# Altium PCB IPG_Rigid.PcbDoc (part 8 of 13)
Units mm, origin at the board's own origin, x right, y up, seen from the top; angles counter-clockwise.
Board outline 69.6 x 90.73 mm, 10 copper layers (TOP, DHOR, DVERT, GND 1, POWER, GND 2, GND 3, AVERT, AHOR, BOT), stack 1.198 mm thick; 745 components, 398 nets, 1997 pads, 2678 vias.
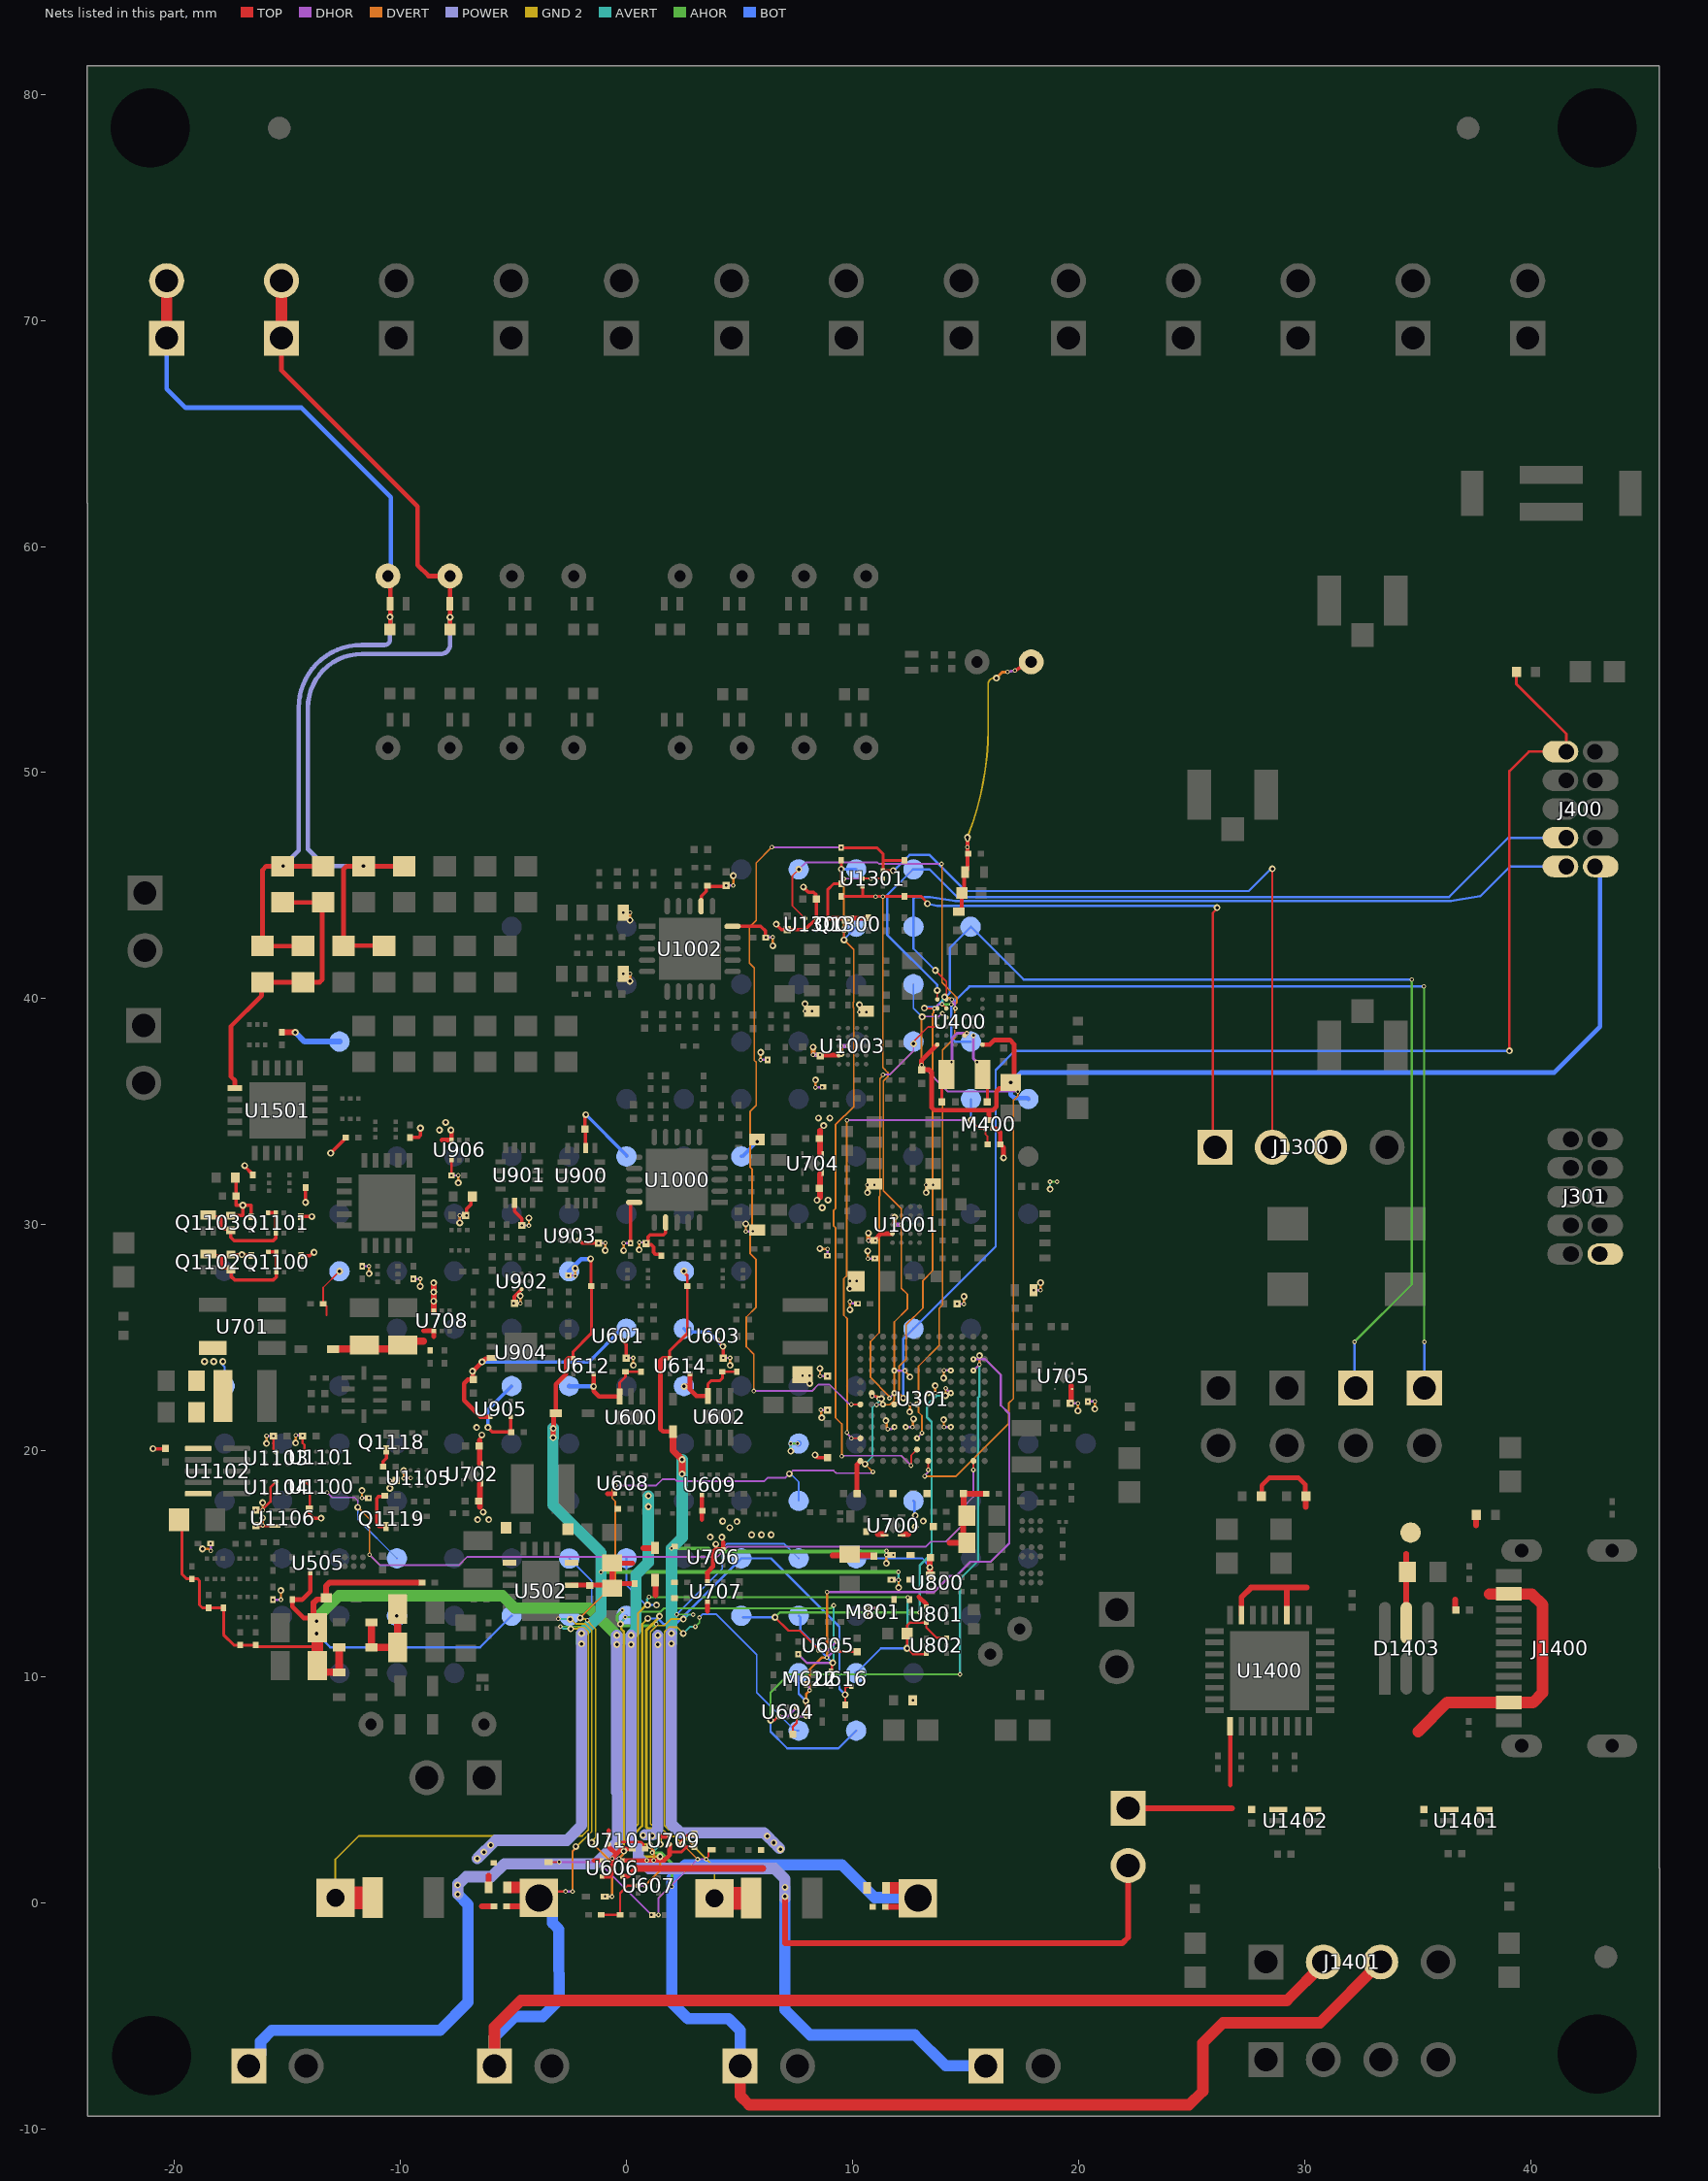
[diagram p12: the nets of this part, all layers, seen from the top]

## Via types
v1: diameter 0.203, hole 0.102, TOP to DHOR, tented top, 561 vias
v2: diameter 0.203, hole 0.102, DHOR to DVERT, tented top, 481 vias
v3: diameter 0.305/0.305/0.305/0.305/0.305/0.305 (per signal layer), hole 0.152, DVERT to AVERT, 397 vias
v4: diameter 0.305/0.305/0/0.305/0.305/0.305 (per signal layer), hole 0.152, DVERT to AVERT, tented top, 283 vias
v5: diameter 0.305/0.305/0.305/0.305/0/0.305/0.305/0.305/0.305/0.305 (per signal layer), hole 0.152, TOP to BOT, 259 vias
v6: diameter 0.305, hole 0.152, TOP to BOT, tented both sides, 169 vias
v7: diameter 0.305/0.305/0.305/0.305/0/0.305/0.305/0.305/0.305/0.305 (per signal layer), hole 0.152, TOP to BOT, tented both sides, 140 vias
v8: diameter 0.203, hole 0.102, AVERT to AHOR, tented top, 101 vias
v9: diameter 0.305/0.305/0.305/0.305/0.305/0.305 (per signal layer), hole 0.152, DVERT to AVERT, tented top, 79 vias
v10: diameter 0.305/0/0/0.305/0/0.305/0.305/0/0/0.305 (per signal layer), hole 0.152, TOP to BOT, tented both sides, 74 vias
v11: diameter 0.305/0.305/0.305/0.305/0.305/0.305/0.305/0.305/0.305/0.305 (per signal layer), hole 0.152, TOP to BOT, tented both sides, 66 vias
v12: diameter 0.203, hole 0.102, AHOR to BOT, tented both sides, 31 vias
v13: diameter 0.203, hole 0.102, DHOR to DVERT, tented both sides, 9 vias
v14: diameter 0.203/0.203 (per signal layer), hole 0.102, DHOR to DVERT, tented top, 7 vias
v15: diameter 0.203/0.203 (per signal layer), hole 0.102, TOP to DHOR, tented top, 7 vias
v16: diameter 0.203, hole 0.102, TOP to DHOR, tented both sides, 5 vias
v17: diameter 0.305, hole 0.152, DVERT to AVERT, tented both sides, 2 vias
v18: diameter 0.305/0.305/0/0.305/0.305/0.305 (per signal layer), hole 0.152, DVERT to AVERT, tented both sides, 2 vias
v19: diameter 0.305, hole 0.152, DVERT to AVERT, tented top, 2 vias
v20: diameter 0.305/0/0/0.305/0.305/0.305/0.305/0/0/0.305 (per signal layer), hole 0.152, TOP to BOT, tented both sides, 1 vias
v21: diameter 0.305/0.305/0/0.305/0.305/0.305 (per signal layer), hole 0.152, DVERT to AVERT, 1 vias
v22: diameter 0.203, hole 0.102, TOP to BOT, tented top, 1 vias

## Nets (pads, with @x,y where several pads share a name; then routed paths per layer and width w, separated by ;. In a path a pad name is that pad's centre, name@x,y a point inside that pad or via, vN(x,y) a via of type N, cw(c..) or ccw(c..) an arc to the next point about the centre after c; other vN are vias at no path point) (continued)
+DVDD: C303.1 C307.2 C308.2 C309.2 C310.2 C312.2 C313.1 C314.1 C315.2 C316.2 C319.1 C320.2 C700.2 C712.2 C1300.2 C1302.2 J301.1 J1300.3 L301.1 M400.2 M801.2 R300.1 R302.2 R303.2 R400.1 R513.1 R514.1 R714.1 TP700.1 U301.A12 U301.D4 U301.D8 U301.D9 U301.F7 U301.G6 U301.J4 U301.J9 U700.1 U705.4 U1300.1 U1300.5 | length 28
  TOP w0.1: C319.1@7.532,23.425 C319.1@8.07,23.425 ; C320.2@8.9,23.33 C320.2@8.93,23.3 ; v1(11.85,23.543) U301.J9@11.85,23.55
  TOP w0.152: v10(6.624,43.298) 6.864,43.058 C1300.2@7.112,43.058 7.892,43.058 U1300.1@7.9,43.05 U1300.5@8.4,43.55 C1302.2@8.4,44.397 ; v10(7.827,44.934) 8.049,44.711 8.281,44.711 8.37,44.622 8.37,44.432 C1302.2@8.403,44.399 ; v10(8.341,19.814) 8.455,19.7 C316.2@8.9,19.7
  TOP w0.203: C307.2@10.2,18.1 10.2,19.4 U301.A12@10.35,19.55 ; M400.2@16.184,34.251 16.371,34.251 16.536,34.086 R400.1@16.536,33.553 16.681,33.408 v10(16.681,32.956)
  TOP w0.254: C319.1@8.07,23.425 8.07,23.383 C319.1@8.123,23.33 ; 12.223,16.32 12.477,16.32 ; 14.295,15.922 C313.1@15.049,15.922 14.898,16.073 14.898,16.973 C314.1@15.049,17.124 14.918,17.256 14.918,17.855 ; 14.919,17.856 14.919,18.101 R302.2@15.919,18.101 ; C712.2@19.673,22.096 19.673,22.88 ; R300.1@20.415,22.18 20.417,22.178 R300.1@20.417,22.175
  DVERT w0.102: v9@-18.737,15.652 -18.732,15.658 -18.503,15.658 -18.423,15.578 v2(-18.396,15.578) ; v2(-15.291,13.411) v3(-15.291,13.818) ; v2(8.099,23.319) 8.105,23.314 8.105,23.013 v9@8.11,23.007 ; v9(8.557,23.643) 8.563,23.637 8.563,23.304 v2(8.568,23.298) ; v2(8.596,21.809) 8.615,21.79 8.615,21.482 v9(8.639,21.458) ; v9@9.875,27.196 9.877,27.198 9.877,27.508 v2(9.878,27.51) 9.88,27.508 v2@9.938,27.508 ; v2(9.881,26.594) 9.884,26.59 9.884,26.241 v9(9.888,26.238) ; v2(10.665,13.051) 10.665,13.024 10.73,12.958 10.73,12.764 v9@10.774,12.72 ; v9(11.479,21.337) 11.508,21.308 11.508,21.032 11.557,20.982 v2(11.557,20.955) ; v2(12.319,23.546) 12.319,23.518 12.538,23.299 v9(12.538,23.267) ; v9@12.535,21.742 12.541,21.748 12.541,22.048 v2(12.546,22.054) ; v2(12.655,21.046) 12.674,21.067 12.674,21.375 v9(12.706,21.406) ; v2@13.654,22.546 13.659,22.552 13.659,22.852 v9@13.665,22.858 ; v9@14.035,21.358 14.041,21.352 14.041,21.052 v2(14.046,21.046) ; v9@14.035,23.242 14.041,23.248 14.041,23.548 v2(14.046,23.554) ; v2@14.927,26.49 14.933,26.496 14.933,26.797 v9@14.938,26.802 ; v2(18.323,27.104) 18.325,27.107 18.325,27.408 v9@18.328,27.41 ; v9(19.976,21.768) v2(19.976,22.098) ; v9(20.72,21.85) v2(20.72,22.18)
  AVERT w0.102: v9@18.739,31.598 v8@18.739,31.899
  DHOR w0.102: v1@-18.429,15.967 -18.396,15.934 v2(-18.396,15.578) ; v1(-15.646,13.411) v2(-15.291,13.411) ; v1(7.788,23.324) 7.79,23.322 8.097,23.322 v2(8.099,23.319) ; v2@8.569,23.299 v1(8.9,23.3) ; v2(8.596,21.809) 8.601,21.804 8.896,21.804 v1(8.902,21.798) ; v2(9.881,26.594) 9.908,26.594 9.982,26.52 v1(10.243,26.52) ; v2@9.882,27.508 10.181,27.508 v1(10.183,27.506) ; v2(10.665,13.051) 10.676,13.039 11.077,13.039 v1(11.089,13.028) ; v2(11.557,20.955) 11.559,20.957 11.731,20.957 11.824,21.05 v1@11.85,21.05 ; v1(11.85,23.543) 11.851,23.545 v2(12.319,23.546) v2(12.319,23.546) ; v1(12.35,21.05) 12.352,21.048 12.652,21.048 v2(12.655,21.046) ; v2(12.546,22.054) 12.548,22.052 12.848,22.052 v1@12.85,22.05 ; v1(13.35,22.55) 13.352,22.548 13.652,22.548 v2@13.654,22.546 ; v2(14.046,21.046) 14.048,21.048 14.348,21.048 v1(14.352,21.05) ; v2(14.046,23.554) 14.048,23.552 14.348,23.552 v1(14.352,23.55) ; v1(14.624,26.494) 14.626,26.492 14.925,26.492 v2@14.927,26.49 ; v1(18.013,27.102) 18.014,27.103 18.322,27.103 v2(18.323,27.104) ; v1(19.671,22.094) 19.673,22.096 19.973,22.096 v2@19.975,22.098 ; v1(20.415,22.176) 20.417,22.178 20.717,22.178 v2@20.719,22.18
  AHOR w0.102: v8(18.742,31.902) v12(19.051,31.903)
  BOT w0.102: TP700.1@12.7,17.78 12.738,17.742 12.738,17.17 v11(12.776,17.132) ; J1300.3@31.115,33.401 J1300.3@31.115,33.43 J1300.3@31.115,33.553
  BOT w0.203: J1300.3@31.115,33.553 J1300.3@31.239,33.553
  other v1: -18.403,15.895 11.852,21.05 12.852,22.05
  other v2: 13.655,22.546 14.929,26.49
  other v9: 10.769,12.695 -18.762,15.657 14.03,21.378 12.53,21.717 13.66,22.878 8.105,22.982 14.03,23.217 14.933,26.822 9.88,27.176 18.323,27.435 18.746,31.571
  other v11: 12.776,16.637 13.131,16.891
  other v22: 12.675,8.966
+HVIN: C701.1 C702.1 L700.1 TP703.1 U701.5 U706.3 U707.3 | length 3.5
  TOP w0.203: U707.3@3.583,14.217 3.583,14.629 3.833,14.879 3.833,15.522 3.952,15.641 U706.3@4.283,15.641 4.283,15.952
  BOT w0.1: v11@-17.958,23.947 -17.958,23.978 v11@-17.919,24.017 ; v11@-17.907,24.028 v11@-17.919,24.017 ; TP703.1@-17.78,22.86 -17.78,23.713 -17.919,23.852 v11@-17.919,24.017
  other v11: 3.956,15.865 3.708,16.182 4.225,16.176 -18.669,23.947 -18.263,23.947 -17.858,23.947
+HVOUT: C703.1 C704.1 D700.1 R703.1 R706.2 TP704.1 U708.4 | length 7.2
  TOP w0.076: R706.2@-13.42,26.5 -13.42,27.22 v7(-12.7,27.94) ; R706.2@-13.375,26.5 -13.277,26.402 -13.277,25.984
  TOP w0.203: -8.987,25.306 U708.4@-8.529,25.306 -8.529,25.036
  TOP w0.33: D700.1@-12.985,24.5 -12.975,24.51 -10.065,24.51 C704.1@-9.9,24.675 -9.726,24.849 -8.987,24.849
+V_UNREG: C705.1 C706.2 C707.2 C710.2 D703.1 R700.2 R701.1 R704.1 R709.1 TP702.1 TP706.1 U700.4 U702.4 U704.4 U707.4 U709.A2 U710.A2 | length 18.6
  TOP w0.076: D703.1@1.257,14.271 1.257,14.069 D703.1@1.291,14.035
  TOP w0.203: U710.A2@-0.782,2.941 -0.782,3.199 ; 1.575,2.941 U709.A2@1.908,2.941 ; 3.583,12.905 U707.4@3.583,13.317
  TOP w0.254: -6.493,17.515 -6.493,18.545 ; 1.291,13.61 D703.1@1.291,14.035 ; 8.569,31.218 8.569,32.248 ; 9.111,15.365 C706.2@10.936,15.365 ; 11.123,16.32 11.377,16.32
  POWER w0.5: v11@0.817,3.019 v11@1.174,3.019 ; v11@1.194,3.039 1.2,3.039 1.382,3.221 v11@1.382,11.419 ; v11@1.381,11.83 1.382,11.829 v11@1.382,11.43
  AVERT w0.102: v9@7.261,20.011 v8@7.261,20.312
  AHOR w0.102: v8(7.264,20.315) v12@7.572,20.316
  BOT w0.076: TP702.1@0,15.24 0,14.046 0.871,13.175 v7(1.328,13.175)
  BOT w0.254: TP706.1@7.603,20.303 TP706.1@7.62,20.32
  other v9: 7.268,19.985
  other v11: 1.138,2.963 0.733,2.982 1.384,11.421 1.384,11.83 5.537,16.281 5.969,16.281 6.4,16.281 -6.591,16.952 -6.092,16.952 -6.341,17.287 8.661,30.75 8.433,31.085 8.918,31.092
  other v12: 7.573,20.316
+VBAT1CHG: R601.1 R607.2 TP601.1 U600.3 U612.4 | length 5
  TOP w0.127: U600.3@-0.3,22.4 -0.3,23.017 -0.05,23.267 R601.1@-0.05,23.495 R607.2@0.635,23.494
  TOP w0.203: U612.4@-1.455,23.399 v7(-1.455,22.843) -1.455,22.639 -1.216,22.4 U600.3@-0.3,22.4
  BOT w0.203: TP601.1@-2.54,22.86 -2.532,22.852 -1.463,22.852 v7(-1.455,22.843)
+VBAT1F: D600.1 D800.2 L600.2 R602.1 R608.2 R609.1 TP604.1 U606.4 U612.1 | length 50.3
  TOP w0.127: U612.1@-2.355,24.099 -2.373,24.117 -2.373,24.37 -1.555,25.189 R602.1@-1.555,27.285 -1.57,27.3 -1.57,28.474 v7(-1.585,28.489)
  TOP w0.203: v7@-3.264,21.014 -3.248,21.014 -3.224,21.038 -3.224,21.593 -3.151,21.666 D600.1@-3.128,21.666 ; v7@-3.246,20.606 -3.245,20.607 v7(-3.243,20.991) v7(-3.243,20.991) ; D600.1@-3.128,21.608 D600.1@-3.128,21.666 ; U612.1@-2.355,24.099 -2.561,24.099 -2.68,23.98 -2.68,23.388 -3.128,22.94 D600.1@-3.128,21.666 ; -1.44,1.876 U606.4@-1.11,1.876
  TOP w0.254: -6.404,-0.152 R608.2@-5.897,-0.152 ; L600.2@-6.105,0.686 -6.105,1.193
  DVERT w0.102: v2(12.037,14.283) 12.041,14.278 12.041,13.977 v4@12.047,13.971
  POWER w0.5: v11(-6.604,1.956) -5.791,2.769 -2.637,2.769 -1.99,3.415 v9(-1.99,11.457) v9@-1.99,11.899 ; v9@-1.991,11.899 v9(-1.991,11.918)
  AVERT w0.102: v8(12.026,14.64) 12.034,14.633 12.034,13.954 v4(12.042,13.946)
  AVERT w0.203: v7@-3.251,20.523 -3.246,20.529 v7(-3.246,20.579)
  AVERT w0.5: v7@-3.251,20.523 -3.251,17.604 -1.136,15.488 v8(-1.136,14.636) -1.136,12.773 v9(-1.991,11.918) v9@-1.991,11.498 ; v7(-3.246,20.579) v7@-3.246,21.002
  DHOR w0.102: v1(11.732,14.279) 11.734,14.281 12.034,14.281 v2(12.037,14.283)
  AHOR w0.102: v8(-1.136,14.636) v8@-1.133,14.638 ; v8@12.024,14.638 v8(12.026,14.64)
  AHOR w0.152: v8@-1.133,14.638 v8@12.024,14.638
  BOT w0.203: TP604.1@-2.54,27.94 -2.001,28.479 -1.594,28.479 v7(-1.585,28.489) v7@-1.575,28.499
  other v11: -6.311,2.248 -6.009,2.551
+VBAT1R: J600.1 J602.1 J1401.2 L600.1 R608.1 TP603.1 | length 67.1
  TOP w0.102: J600.1@-3.875,0.221 -3.512,0.584 -3.437,0.509 v1(-2.693,0.509)
  TOP w0.254: R608.1@-5.271,-0.152 J600.1@-4.388,-0.152
  TOP w0.5: J602.1@-5.842,-7.214 -5.842,-5.486 -4.674,-4.318 29.215,-4.318 30.836,-2.697 J1401.2@30.836,-2.616 ; L600.1@-5.168,0.683 J600.1@-4.215,0.683
  DVERT w0.102: v2(-2.388,0.505) -2.388,2.285 -2.237,2.436 v9(-2.237,2.491)
  GND 2 w0.076: v4(-2.489,12.548) -2.448,12.548 -2.238,12.337 -1.817,12.337 -1.534,12.055 -1.534,10.858 -1.534,3.759 -1.534,3.154 -2.197,2.491 v9(-2.237,2.491)
  AVERT w0.076: v8(-3.013,12.566) -3.003,12.557 -2.499,12.557 v4(-2.489,12.548)
  DHOR w0.102: v1(-2.693,0.509) v1(-2.693,0.509) -2.392,0.507 v2@-2.39,0.505
  AHOR w0.076: v8(-3.013,12.566) -3.006,12.56 -2.533,12.56 v12(-2.526,12.554)
  BOT w0.076: v12(-2.526,12.554) -2.526,12.663 TP603.1@-2.506,12.683
  BOT w0.5: J602.1@-5.842,-7.214 -5.842,-5.944 -4.928,-5.029 -3.713,-5.029 -2.976,-4.292 -2.993,-1.83 -2.993,-1.829 -2.998,-1.168 -3.2,-0.965 -3.275,-0.891 -3.275,-0.379 J600.1@-3.875,0.221
+VBAT1SW: R625.1 R712.2 TP605.1 U606.3 U616.4 U709.A1 | length 30.9
  TOP w0.102: R625.1@9.677,8.755 v7(9.677,9.206) 9.677,9.503 9.737,9.562 U616.4@9.95,9.562
  TOP w0.127: 1.908,2.258 2.441,2.258 2.671,2.489 R712.2@2.997,2.489
  TOP w0.203: U606.3@-0.185,1.874 1.671,1.874 1.908,2.111 1.908,2.258 U709.A1@1.908,2.591
  DVERT w0.102: v9(1.029,2.539) 1.029,2.484 1.203,2.311 v2(1.203,1.872)
  GND 2 w0.102: v7(0.942,12.581) 0.693,12.331 0.693,10.858 0.693,3.759 0.693,3.406 0.403,3.116 0.403,2.763 0.589,2.577 0.992,2.577 v9(1.029,2.539)
  DHOR w0.102: v1(0.898,1.876) 0.9,1.874 v2@1.199,1.874
  BOT w0.102: v7(0.942,12.581) 1.394,12.581 1.649,12.326 2.166,12.326 TP605.1@5.08,15.24 6.401,15.24 9.423,12.217 9.423,9.46 v7(9.677,9.206)
+VBAT2CHG: R612.1 R621.2 TP619.1 U602.3 U614.4 | length 4.1
  TOP w0.076: R621.2@4.88,23.495 R621.2@4.883,23.498
  TOP w0.127: U602.3@3.6,22.425 3.6,22.955 3.734,23.089 4.123,23.089 4.242,23.208 R612.1@4.242,23.495 R621.2@4.88,23.495
  TOP w0.203: v7(2.544,22.848) 2.562,22.866 2.812,22.866 ; U614.4@2.812,23.392 2.812,22.866 ; U602.3@3.6,22.425 3.091,22.425 2.812,22.704 2.812,22.866
+VBAT2F: D602.1 D801.2 L601.2 R613.1 R614.2 R615.1 TP621.1 U606.1 U614.1 | length 49.5
  TOP w0.127: U614.1@1.912,24.099 1.9,24.112 1.9,24.404 2.692,25.196 2.692,27.748 2.543,27.897 v7(2.543,27.945)
  TOP w0.203: U606.1@-0.185,1.174 0.053,1.174 0.403,1.524 ; U614.1@1.912,24.099 1.618,24.099 1.499,23.98 1.499,20.969 1.618,20.85 D602.1@2.057,20.85
  TOP w0.3: D602.1@2.057,20.85 2.057,20.015 v7(2.464,19.609) v7(2.464,18.974)
  TOP w0.305: 0.403,1.524 6.02,1.524
  DVERT w0.102: v2@11.5,15.392 11.5,15.051 v4@11.504,15.046
  POWER w0.5: v9(1.988,11.916) v9(1.988,11.464) 1.987,11.463 1.987,3.489 2.384,3.092 6.09,3.092 v7(6.229,2.953) 6.502,2.68 v7@6.775,2.407
  AVERT w0.102: v4(11.499,15.021) 11.501,15.023 11.501,15.575 v8(11.503,15.577)
  AVERT w0.5: v9@1.988,11.493 v9(1.988,11.916) 1.991,11.919 v8(1.991,15.682) 2.464,16.155 v7(2.464,19.609)
  DHOR w0.102: v2(11.5,15.392) v1(11.808,15.392)
  AHOR w0.152: v8(1.991,15.682) 3.638,15.682 3.778,15.542 11.454,15.542 11.489,15.577 v8(11.503,15.577)
  other v7: 6.815,2.367
  other v11: 6.522,2.66
+VBAT2R: J603.1 J605.1 J1401.3 L601.1 R614.1 TP620.1 | length 74.3
  TOP w0.254: R614.1@11.502,-0.17 J603.1@12.385,-0.17
  TOP w0.5: J605.1@5.029,-7.214 5.029,-8.534 5.43,-8.935 24.898,-8.935 25.502,-8.331 25.502,-6.198 26.391,-5.309 30.683,-5.309 J1401.3@33.376,-2.616 ; L601.1@11.605,0.665 J603.1@12.558,0.665
  GND 2 w0.127: v4(1.459,12.679) 1.459,12.647 0.883,12.071 0.883,10.858 0.883,3.759 0.883,3.348 0.958,3.273 1.266,3.273 1.496,3.044 v9(1.496,2.593)
  AVERT w0.127: v8(1.135,2.227) 1.135,2.229 1.496,2.59 v9(1.496,2.593) ; v8(1.318,12.326) 1.332,12.34 1.332,12.504 1.459,12.631 v4(1.459,12.679)
  AHOR w0.127: v12(-0.186,12.942) -0.408,12.719 -0.408,12.48 -0.174,12.247 1.218,12.247 1.297,12.326 v8(1.318,12.326) ; v8(1.135,2.227) 1.145,2.217 1.535,2.217 2.007,1.746 v12(2.007,0.712)
  BOT w0.127: TP620.1@-0.11,12.59 TP620.1@0,12.7
  BOT w0.5: J605.1@5.029,-7.214 5.029,-5.639 4.521,-5.131 2.718,-5.131 2.007,-4.42 2.007,-1.829 v12(2.007,0.712) 2.007,1.092 2.603,1.688 9.53,1.688 10.984,0.235 12.867,0.235 J603.1@12.898,0.203
+VBAT2SW: R628.1 R713.2 TP622.1 U606.6 U616.1 U710.A1 | length 30.8
  TOP w0.102: U616.1@9.05,10.262 9.099,10.312 9.088,10.312 9.088,10.578 v7(9.126,10.616)
  TOP w0.203: U606.6@-1.085,1.174 -0.754,1.173 -0.635,1.292 v1(-0.635,1.961) -0.452,2.145 ; U710.A1@-0.782,2.591 -0.782,2.475 -0.452,2.145 ; R713.2@0.26,2.388 -0.209,2.388 -0.452,2.145
  DVERT w0.102: v2(-0.33,1.957) -0.33,1.963 -0.153,2.14 -0.153,2.25 v9(-0.114,2.289)
  GND 2 w0.102: v4(-0.262,12.334) -0.226,12.298 -0.226,12.111 -0.114,11.999 v9(-0.114,2.289)
  AVERT w0.102: v4(-0.262,12.334) -0.262,12.389 -0.075,12.577 -0.075,12.625 v8(-0.055,12.645) ; v7(9.126,10.616) 9.163,10.653 9.163,13.15 v8(9.169,13.157)
  DHOR w0.102: v1(-0.635,1.961) -0.633,1.959 v2@-0.333,1.959 ; v1(7.597,11.003) 7.991,10.609 9.118,10.609 v7(9.126,10.616)
  AHOR w0.102: v8(-0.055,12.645) 0.418,12.645 0.651,12.878 1.507,12.878 1.659,13.029 9.042,13.029 v8(9.169,13.157)
  BOT w0.102: TP622.1@7.62,12.7 7.7,12.62 7.7,12.043 v7(9.126,10.616)
+VBUS: C1400.1 C1401.2 C1405.2 C1407.2 D1403.5 J503.1 J1400.A4 J1400.A9 R1400.1 R1403.2 R1411.2 TP1402.1 U1400.1 U1400.19 U1400.23 U1401.1 U1401.6 U1402.1 U1402.6 | length 32.7
  TOP w0.2: 26.711,5.217 U1400.1@26.711,7.819 ; R1411.2@28.092,17.988 28.105,18.001 28.105,18.479 28.428,18.801 29.743,18.801 30.031,18.513 30.031,18.017 R1403.2@30.06,17.988
  TOP w0.254: J503.1@22.2,4.191 26.797,4.191 ; U1400.23@27.211,12.721 27.211,13.52 27.635,13.945 29.211,13.945 ; U1400.19@29.211,12.721 29.211,13.91 29.245,13.945 30.099,13.945 ; 30.06,17.514 R1403.2@30.06,17.988 ; D1403.5@34.506,12.388 34.506,15.443 ; C1401.2@36.673,12.938 36.673,13.411 ; 37.599,16.697 R1400.1@37.599,17.17
  TOP w0.508: 35.027,7.569 36.322,8.865 38.633,8.865 38.684,8.814 38.687,8.817 38.991,8.817 J1400.A4@39.037,8.863 40.105,8.863 40.538,9.296 40.538,13.183 40.058,13.663 J1400.A9@39.037,13.663 38.181,13.663
+VCARR: C500.2 C501.2 D500.2 D503.1 TP501.1 | length 4
  TOP w0.33: D503.1@-11.285,12.4 D500.2@-11.285,11.3 C500.2@-10.125,11.3 C501.2@-10.125,13
  other v7: -10.16,12.7
+VCHG_RAIL: C508.1 C509.1 C510.2 C601.2 C604.2 D703.2 J503.2 J505.1 R524.1 R600.1 R611.1 TP510.1 U502.14 U601.B1 U603.B1 U608.4 U609.4 | length 71.6
  TOP w0.152: U601.B1@-0.202,24.912 -0.202,24.9 -0.005,24.703 v1(-0.005,24.105) ; U603.B1@4.031,24.912 4.031,24.9 4.237,24.693 4.237,24.645 v11(4.266,24.616) ; v11@4.269,24.661 4.275,24.655 4.275,24.113 v1(4.283,24.105)
  TOP w0.203: -0.838,18.1 U608.4@-0.503,18.1 ; 3.333,16.954 3.333,17.941
  TOP w0.229: U502.14@-2.425,14.05 -2.414,14.061 -0.636,14.061 C508.1@-0.636,15.029 0.272,15.029 ; C509.1@-0.258,14.125 R524.1@0.356,14.125 ; D703.2@1.211,15.655 D703.2@1.257,15.701
  TOP w0.254: 0.752,15.684 D703.2@1.177,15.684 ; v11(7.01,0.277) 7.01,-1.767 7.022,-1.778 21.946,-1.778 22.2,-1.524 J503.2@22.2,1.651
  DVERT w0.102: v9(0.3,23.778) v2(0.3,24.109) ; v9(4.588,23.778) v2(4.588,24.109)
  POWER w0.5: v9@0.202,11.427 0.202,10.858 0.202,3.759 0.202,2.721 0.527,2.395 0.527,1.987 0.994,1.521 6.536,1.521 7.006,1.051 7.006,0.277 v11@7.006,0.203 ; v9@0.203,11.438 v9@0.203,11.838
  AVERT w0.5: v9@0.206,11.494 v9(0.206,11.839) 0.415,12.049 0.415,14.512 0.965,15.062 v9(0.965,17.526) v9(0.965,18.003)
  DHOR w0.102: v1(-0.005,24.105) -0.003,24.107 0.297,24.107 v2(0.3,24.109) ; v1(4.283,24.105) 4.285,24.107 4.585,24.107 v2@4.587,24.109
  BOT w0.152: TP510.1@2.54,25.4 2.68,25.26 3.623,25.26 v11(4.266,24.616)
  BOT w0.5: v11(7.01,0.686) 7.01,-4.724 8.128,-5.842 12.751,-5.842 14.122,-7.214 J505.1@15.9,-7.214
  other v9: 0.206,11.43
  other v11: 4.569,16.596 4.888,16.87 4.25,16.881
+VDD_BLE: C404.2 C405.1 J400.1 M400.3 TP401.1 U400.A6 U400.G6 | length 47.6
  TOP w0.1: M400.3@16.034,34.621 M400.3@16.034,34.674
  TOP w0.203: U400.G6@13.752,37.968 13.054,37.269 13.054,36.857 C404.2@13.053,36.856 13.392,36.856 13.505,36.743 13.505,35.185 13.624,35.066 16.034,35.066 ; U400.A6@15.753,37.968 16.073,37.968 16.28,38.175 16.965,38.175 17.148,37.992 17.148,36.439 v7(17,36.292) 16.727,36.018 16.483,36.018 16.364,35.899 16.364,35.215 16.215,35.066 16.034,35.066 ; M400.3@16.034,34.621 16.034,35.066
  BOT w0.203: TP401.1@17.78,35.56 17.74,35.6 17.159,35.6 17,35.759 v7(17,36.292) 17.437,36.728 18.72,36.728 ; 18.93,36.728 18.72,36.728 ; J400.1@42.85,45.847 43.078,45.618 43.078,38.76 41.046,36.728 19.28,36.728 18.72,36.728
+VDDA: C711.2 C1004.2 C1006.2 C1020.2 C1021.1 D1000.1 D1001.1 D1002.1 D1003.1 D1008.1 D1009.1 D1010.1 D1011.1 R1000.1 R1003.1 R1013.2 R1014.2 R1031.2 R1032.1 R1044.2 R1045.2 TP711.1 U704.1 U1000.15 U1000.17 U1001.A2 U1001.B3 U1002.15 U1002.17 U1003.A2 U1003.B3 | length 24.2
  TOP w0.152: v1(0.178,29.185) 0.178,30.946 0.218,30.987 U1000.15@0.342,30.987 ; v1(0.868,29.215) 0.918,29.215 0.947,29.244 0.947,29.454 1.037,29.543 1.643,29.543 1.732,29.632 U1000.17@1.732,30.096 ; C1004.2@0.893,29.19 0.893,29.183 0.947,29.129 1.087,29.129 1.199,29.017 1.199,28.772 1.288,28.683 1.501,28.683 1.549,28.634 R1000.1@1.549,28.631 ; U1002.17@3.3,44.091 3.317,44.107 3.317,44.54 3.534,44.758 3.534,44.954 R1031.2@3.58,45 3.607,44.973 4.373,44.973 C1021.1@4.4,45 ; U1002.15@4.691,43.2 5.94,43.2 6.156,42.984 R1045.2@6.156,42.7
  TOP w0.203: C1020.2@8.572,37.5 U1003.A2@9.4,37.5 ; C1006.2@10.997,29.304 10.997,29.339 11.262,29.604 U1001.A2@11.767,29.604
  TOP w0.254: 8.567,33.137 8.567,34.167
  DVERT w0.102: v9(-0.127,28.858) v2(-0.127,29.189) ; v9(0.155,40.773) v2(0.155,41.104) ; v9(0.155,43.473) v2(0.155,43.804) ; v9(0.563,28.888) v2(0.563,29.219) ; v2@4.721,45.013 4.724,45.016 v3(4.724,45.438) ; v2(5.278,29.706) v9(5.278,30.037) ; v2(5.938,37.291) v9(5.938,37.622) ; v2(6.469,42.72) 6.473,42.716 6.473,42.346 v3(6.477,42.342) ; v2(7.899,39.446) v9(7.899,39.777) ; v2(8.362,36.07) v9(8.362,36.401) ; v9@8.581,28.94 8.587,28.935 8.888,28.935 v2(8.893,28.929) ; v2(10.304,39.4) v9(10.304,39.731) ; v9(10.662,31.427) v2(10.662,31.758) ; v9@10.674,28.814 10.679,28.808 10.679,28.507 v2(10.685,28.502) ; v9(13.262,31.427) v2(13.262,31.758)
  DVERT w0.203: v2(8.259,37.519) v9(8.259,37.849) ; v9(9.499,37.573) v2(9.499,37.904) ; v2(10.705,29.297) v9(10.705,29.628) ; v2(11.862,30) v9(11.862,30.331)
  DHOR w0.102: v1(-0.15,41.1) -0.148,41.102 0.152,41.102 v2(0.155,41.104) ; v1(-0.15,43.8) -0.148,43.802 0.152,43.802 v2(0.155,43.804) ; v2@-0.126,29.189 -0.124,29.187 0.176,29.187 v1(0.178,29.185) ; v2(0.563,29.219) 0.567,29.217 0.866,29.217 v1(0.868,29.215) ; v1(4.415,45.008) 4.417,45.009 4.717,45.009 v2(4.72,45.011) ; v2@5.28,29.706 5.282,29.708 5.581,29.708 v1(5.583,29.71) ; v2(5.938,37.291) 5.941,37.293 6.241,37.293 v1(6.243,37.295) ; v1(6.164,42.716) 6.166,42.718 6.466,42.718 v2@6.468,42.72 ; v2(7.899,39.446) 7.902,39.448 8.202,39.448 v1(8.204,39.45) ; v2@8.363,36.07 8.365,36.072 8.665,36.072 v1(8.667,36.074) ; v1@8.889,28.626 8.891,28.628 8.891,28.927 v2(8.893,28.929) ; v2(10.304,39.4) 10.307,39.402 10.607,39.402 v1(10.609,39.404) ; v2(10.662,31.758) 10.665,31.756 10.965,31.756 v1(10.967,31.754) ; v2(10.685,28.502) 10.687,28.504 10.987,28.504 v1@10.989,28.506 ; v2@13.263,31.758 13.265,31.756 v1(13.567,31.754) v1(13.567,31.754)
  DHOR w0.203: v2(8.259,37.519) 8.263,37.521 8.562,37.521 v1(8.564,37.522) ; v2(9.499,37.904) 9.502,37.902 9.802,37.902 v1(9.804,37.9) ; v2(10.705,29.297) 10.709,29.299 11.008,29.299 v1(11.01,29.301) ; v2@11.863,30 11.865,30.002 12.165,30.002 v1(12.167,30.004)
  BOT w0.152: TP711.1@5.08,33.02 5.126,33.02 v11(5.775,33.668)
  other v1: 10.99,28.506 8.889,28.624
  other v9: 10.669,28.834 8.561,28.945
  other v11: 8.726,34.387 8.497,34.722 8.996,34.722
+VDDS: C708.2 C1100.2 C1102.2 C1109.2 C1112.2 C1114.2 C1115.2 C1117.2 R903.1 R1108.1 TP709.1 U702.1 U905.4 U1100.8 U1101.8 U1102.1 U1102.5 U1103.5 U1104.5 U1105.C2 U1106.6 | length 16.6
  TOP w0.1: U702.1@-6.405,19.476 -6.389,19.46 U702.1@-6.389,19.349
  TOP w0.102: v15(-16.405,16.695) -16.378,16.668 U1106.6@-15.559,16.668 ; C1115.2@-16.403,17.374 -16.129,17.374 -15.757,17.747 -15.757,18.369 U1104.5@-15.499,18.627 ; U1103.5@-15.5,19.931 -15.626,20.057 C1114.2@-15.626,20.651 ; v15(-14.334,20.674) -14.334,20.342 -14.25,20.258 U1101.8@-14.25,19.956 ; U1100.8@-14.25,18.65 -14.011,18.411 -14.011,17.452 C1102.2@-14.035,17.428 ; C1114.2@-15.626,20.651 v15(-15.625,20.65)
  TOP w0.152: v10(-20.955,20.091) C1109.2@-20.409,20.091 ; C1102.2@-14.037,17.43 -14.037,17.212 -13.838,17.013 v10@-13.513,17.013 ; v11(-6.131,21.031) -5.94,20.84 R903.1@-5.118,20.84 ; U905.4@-5.131,21.5 -5.118,21.487 R903.1@-5.118,20.84 ; R903.1@-5.106,20.828 R903.1@-5.118,20.84
  TOP w0.254: -6.496,19.435 -6.496,20.465
  DVERT w0.102: v9(-16.103,17.031) -16.101,17.029 -16.101,16.701 v14(-16.1,16.699) ; v14(-16.1,17.372) v9(-16.1,17.703) ; v9(-15.93,20.323) v14(-15.93,20.654) ; v9(-14.64,20.347) v14(-14.64,20.678) ; v14(-11.705,17.911) v9(-11.705,18.242) ; v9(-10.47,18.343) v14(-10.47,18.674) ; v14(-9.857,18.785) v9(-9.857,19.116)
  DHOR w0.102: v15(-16.405,16.695) -16.403,16.697 -16.103,16.697 v14@-16.101,16.699 ; v15(-16.405,17.376) -16.403,17.374 -16.103,17.374 v14@-16.101,17.372 ; v14(-15.93,20.654) -15.926,20.652 -15.627,20.652 v15(-15.625,20.65) ; v14(-14.64,20.678) -14.636,20.676 -14.336,20.676 v15(-14.334,20.674) ; v14@-11.703,17.911 -11.701,17.913 -11.402,17.913 v15(-11.4,17.915) ; v14@-10.468,18.674 -10.466,18.672 -10.167,18.672 v15(-10.165,18.67) ; v14@-9.856,18.785 -9.854,18.787 v15(-9.552,18.789) v15(-9.552,18.789)
  BOT w0.152: v11@-6.131,21.006 v11(-6.131,21.031) -6.131,21.809 TP709.1@-5.08,22.86
  other v10: -13.513,17.018
  other v11: -6.401,20.696 -6.629,21.031
+VGND1R: F600.1 J601.1 TP608.1 | length 29.6
  TOP w1: J601.1@-12.879,0.221 F600.1@-11.406,0.221
  GND 2 w0.076: J601.1@-12.879,0.221 -12.879,1.929 -11.847,2.961 -1.96,2.961 -1.687,3.234 -1.687,11.992 -1.88,12.185 -2.113,12.185 -2.174,12.124 v4(-2.469,12.124)
  AVERT w0.076: v8(-2.925,12.225) -2.891,12.225 -2.79,12.124 v4(-2.469,12.124)
  AHOR w0.076: v8(-2.925,12.225) -1.977,12.225 -1.727,12.475 v12(-1.727,12.497)
  BOT w0.076: TP608.1@-2.533,15.233 -1.538,14.238 -1.538,12.686 v12(-1.727,12.497)
+VGND2R: F601.1 J604.1 TP624.1 | length 24.1
  TOP w1: J604.1@3.894,0.203 F601.1@5.367,0.203
  GND 2 w0.076: v4(2.516,11.916) 2.241,12.191 1.887,12.191 1.683,11.988 1.683,3.423 1.872,3.234 2.233,3.234 3.894,1.573 J604.1@3.894,0.203
  AVERT w0.076: v4(2.516,11.916) 2.818,12.217 v8(3.048,12.217)
  AHOR w0.076: v8(3.048,12.217) 3.226,12.395 v12(3.226,12.624)
  BOT w0.076: v12(3.226,12.624) 3.379,12.776 3.955,12.776 5.758,10.974 5.758,9.313 7.45,7.62 TP624.1@7.62,7.62
+VIMP_3V3: C900.2 C901.2 C906.2 R913.2 TP901.1 U902.C2 U903.A2 U904.3 U905.3 | length 14.8
  TOP w0.152: v1(-5.002,26.522) -4.962,26.561 -4.962,26.823 U902.C2@-4.638,27.147 ; U903.A2@-2.115,29.312 -2.094,29.312 -1.972,29.189 v1(-1.245,29.189)
  TOP w0.203: v11@-6.782,23.552 -6.777,23.548 -6.393,23.932 v11(-6.391,23.932) -6.244,24.079 -5.982,24.079 U904.3@-5.959,24.102 ; C901.2@-6.779,23.163 -6.797,23.181 -6.797,23.5 v11(-6.812,23.516) v11@-6.778,23.516 ; C901.2@-6.778,23.164 -6.789,23.152 -7.02,23.152 -7.188,22.984 -7.188,22.225 -6.463,21.5 U905.3@-6.031,21.5
  DVERT w0.102: v2(-4.697,26.518) v9(-4.697,26.849) ; v2(-2.271,27.737) v9(-2.271,28.068) ; v9(-0.94,28.863) v2(-0.94,29.193)
  DHOR w0.102: v1(-5.002,26.522) -5,26.52 -4.7,26.52 v2@-4.698,26.518 ; v1(-2.576,27.741) -2.574,27.739 -2.275,27.739 v2@-2.273,27.737 ; v1(-1.245,29.189) -1.243,29.191 -0.943,29.191 v2(-0.94,29.193)
  BOT w0.152: v11(-6.391,23.932) -1.666,23.932 -0.198,25.4 TP901.1@0,25.4
+VIMP_PP: C902.2 C903.2 TP905.1 U900.14 U901.14 U906.3 | length 6.7
  TOP w0.152: U901.14@-4.953,30.963 -4.953,30.593 -4.628,30.267 -4.628,29.973 v1(-4.623,29.968) ; U900.14@-1.801,33.391 -1.817,33.407 -1.817,34.079 -1.834,34.096 C903.2@-1.834,34.239 -1.834,34.773 -1.83,34.776 -1.83,34.843 v11(-1.801,34.872)
  TOP w0.203: -8.157,33.749 U906.3@-7.745,33.749 v11@-7.745,34.161
  DVERT w0.102: v2(-4.318,29.964) v9(-4.318,30.295)
  DHOR w0.102: v1(-4.623,29.968) -4.621,29.966 -4.321,29.966 v2(-4.318,29.964)
  BOT w0.152: v11@-1.803,34.874 v11(-1.801,34.872) 0,33.071 TP905.1@0,33.02
  other v11: -8.271,34.188 -7.772,34.188 -8.001,34.523
+VMAGNET: C801.2 D800.1 D801.1 R800.1 R801.1 TP800.1 U800.2 U801.4 | length 4.9
  TOP w0.1: U800.2@13.441,14.483 U800.2@13.446,14.478
  TOP w0.203: 12.93,13.544 13.266,13.207 U801.4@13.266,13.101
  TOP w0.254: U800.2@13.419,14.499 13.432,14.512 13.432,14.828 v7(13.423,14.838) C801.2@13.423,15.278
  BOT w0.076: TP800.1@10.16,15.24 13.109,15.24 13.244,15.105 13.244,15.036 13.423,14.857 v7(13.423,14.838)
+VPP: C1500.2 C1501.2 R915.1 R1100.1 R1101.1 R1102.1 R1103.2 R1104.1 R1105.2 R1500.2 R1501.2 R1502.1 R1503.1 R1504.1 R1505.1 R1506.1 R1507.1 R1508.1 TP705.1 U708.3 U906.4 | length 16.5
  TOP w0.102: R915.1@-7.745,32.182 U906.4@-7.745,32.849 ; C1500.2@-7.115,30.404 v1(-7.073,30.404)
  TOP w0.152: R1101.1@-17.506,30.404 -16.977,30.404 ; R1100.1@-17.499,28.677 v7(-17.018,28.677) -16.995,28.655 -16.621,28.655 R1102.1@-16.599,28.632 ; R1501.2@-17.304,32.08 -17.284,32.06 -17.284,31.265 -17.284,30.871 ; -17.274,30.861 v7(-16.977,30.861) ; -16.977,30.401 -16.977,30.404 ; -16.974,30.404 -16.977,30.404 ; v7(-16.891,32.614) -16.891,32.58 -16.533,32.222 R1507.1@-16.533,32.202 ; R1104.1@-16.608,30.356 -16.608,30.861 v7(-16.977,30.861) ; R1105.2@-14.408,30.356 v7(-13.919,30.356) ; R1103.2@-14.399,28.632 -14.009,28.632 -13.864,28.777 v7(-13.823,28.777) ; v7(-14.199,30.988) R1506.1@-14.199,31.642 ; v10(-13.088,33.168) -12.421,33.835 R1502.1@-12.421,33.858 ; R1503.1@-9.576,33.858 -9.208,33.858 -9.119,33.947 v10(-9.119,34.273) ; C1500.2@-7.115,30.404 -7.087,30.432 -7.087,30.683 -6.892,30.878 -6.892,31.165 R1500.2@-6.815,31.242 ; -16.977,30.404 v7(-16.977,30.861)
  TOP w0.254: R1508.1@-15.238,38.51 v11(-14.656,38.51) ; v11@-8.534,27.33 v11(-8.534,27.025) v11(-8.534,26.619) -8.529,26.614 U708.3@-8.529,26.206 U708.3@-8.529,26.163
  DVERT w0.102: v9(-11.388,27.835) v2(-11.388,28.166) ; v9(-9.128,27.275) v2(-9.128,27.606) ; v9(-7.442,31.852) v2(-7.442,32.183) ; v9(-7.378,30.077) v2(-7.378,30.408)
  DHOR w0.102: v1(-11.693,28.162) -11.691,28.164 -11.392,28.164 v2@-11.39,28.166 ; v1(-9.433,27.602) -9.431,27.604 -9.131,27.604 v2@-9.129,27.606 ; v1(-7.747,32.179) -7.745,32.181 -7.445,32.181 v2(-7.442,32.183) ; v2@-7.376,30.408 -7.374,30.406 -7.075,30.406 v1(-7.073,30.404)
  BOT w0.254: v11(-14.656,38.51) -14.246,38.1 TP705.1@-12.7,38.1
  other v11: -8.534,27.43
+VRECT: C504.2 C505.2 D500.1 D501.1 D502.1 J504.1 R500.1 R501.1 R502.1 R503.1 R505.1 R509.1 R510.1 R521.1 TP502.1 U505.4 | length 83.7
  TOP w0.127: R502.1@-19.66,16.489 -19.66,14.532 -19.469,14.341 -19.238,14.341 R501.1@-19.228,14.331 -18.972,14.331 -18.898,14.256 -18.898,13.183 -18.77,13.056 R510.1@-18.491,13.055 -18.162,13.055 R503.1@-17.831,13.055 -17.831,11.861 -17.374,11.404 R509.1@-17.094,11.404 R505.1@-16.408,11.404 -16.408,11.399 -16.347,11.337 -13.675,11.337
  TOP w0.203: U505.4@-13.99,14.587 -13.99,13.772 -14.352,13.411 R500.1@-14.783,13.411 -14.783,13.1 -14.285,12.602 -13.998,12.602 C505.2@-13.948,12.552 ; C505.2@-13.948,12.265 C505.2@-13.948,12.552 ; C505.2@-13.948,12.465 C505.2@-13.948,12.552 ; C505.2@-13.794,12.286 C505.2@-13.675,12.167
  TOP w0.254: C505.2@-13.843,12.465 C505.2@-13.843,12.552 ; C505.2@-13.794,12.286 -13.843,12.335 C505.2@-13.843,12.552 ; R521.1@-9.043,14.173 -13.135,14.173 -13.284,14.024 D502.1@-13.284,13.487 -13.344,13.427 -13.694,13.427 -13.843,13.278 C505.2@-13.843,12.552
  TOP w0.33: C504.2@-13.675,10.5 -13.675,10.459 -13.415,10.2 -12.725,10.2 -12.715,10.21 D500.1@-12.715,11.3
  TOP w0.508: C504.2@-13.675,10.5 -13.675,11.337 -13.675,11.913 C505.2@-13.675,12.167
  POWER w0.5: v11(-7.468,0.79) -7.102,1.154 -5.987,1.154 -5.408,1.733 -1.366,1.733 -0.406,2.692 -0.406,4.877 -0.432,4.903 v11@-0.432,11.426 ; v11@-7.466,0.389 v11@-7.466,0.789 ; v11@-0.432,11.437 v11@-0.432,11.836
  AHOR w0.5: v7(-13.716,11.913) v7(-13.716,12.465) -13.716,12.598 -12.726,13.589 -5.488,13.589 -4.946,13.047 -1.639,13.047 v11(-0.429,11.838) v11@-0.429,11.501
  BOT w0.102: v7(-13.716,11.913) -13.103,11.3 -6.48,11.3 TP502.1@-5.08,12.7
  BOT w0.5: J504.1@-16.713,-7.214 -16.188,-6.689 -16.188,-6.128 -15.697,-5.637 -8.248,-5.637 -7.01,-4.399 -7.01,-1.829 -7.01,-0.076 v11(-7.468,0.381) v11(-7.468,0.79) v11@-7.468,0.838
  other v11: -0.429,11.429
ACC.SCL: J1300.1 R1300.2 R1302.1 U301.F10 U1301.3 | length 52.6
  TOP w0.102: J1300.1@26.035,33.43 25.938,33.527 25.938,43.784 26.129,43.975 v7(26.129,44.025)
  TOP w0.127: R1300.2@9.5,44.52 10.447,44.52 ; U1301.3@10.447,44.964 10.447,44.52 ; v1@11.026,44.52 10.447,44.52 ; v1(11.027,44.519) 12.3,44.52 13.052,44.52 13.142,44.43 13.142,44.419 13.31,44.251 v7(13.31,44.203)
  DVERT w0.076: v2(11.061,22.029) 11.064,22.032 11.648,22.032 11.85,22.234 11.85,25.698 12.433,26.282 12.433,26.918 12.161,27.19 12.161,30.703 11.367,31.498 11.367,36.351 11.566,36.551 11.566,36.73 11.439,36.856 11.339,36.956 v2(11.339,44.519)
  DHOR w0.076: v1(11.027,44.519) v2(11.339,44.519) ; v2(11.061,22.029) 11.072,22.039 11.339,22.039 v1@11.349,22.049
  BOT w0.102: v7(13.31,44.203) 13.737,44.107 13.759,44.104 25.994,44.104 26.074,44.025 v7(26.129,44.025)
  other v1: 11.35,22.05
ACC.SDA: J1300.2 R1301.2 R1303.1 U301.F12 U1301.6 | length 68.1
  TOP w0.076: v1(9.951,22.05) U301.F12@10.35,22.05
  TOP w0.1: J1300.2@28.575,33.43 v11(28.575,45.745)
  TOP w0.127: v1(9.5,46.68) 11.08,46.68 11.347,46.413 11.347,46.12 ; v7(11.801,45.663) 11.795,45.669 11.352,45.669 U1301.6@11.347,45.664 11.347,46.12 ; R1303.1@12.3,46.12 11.347,46.12
  DVERT w0.076: v2(5.636,22.644) 5.636,24.272 5.302,24.607 5.302,25.912 5.735,26.345 5.735,28.453 5.474,28.714 5.474,29.596 5.554,29.677 5.554,32.461 5.477,32.539 5.477,35.021 5.737,35.281 5.737,37.187 5.656,37.267 5.656,41.354 5.443,41.568 5.443,43.164 5.74,43.461 5.74,46.007 v2(6.434,46.701)
  DHOR w0.076: v2(5.636,22.644) 8.208,22.644 8.491,22.927 8.98,22.927 9.833,22.074 9.926,22.074 v1(9.951,22.05) ; v2(6.434,46.701) 6.445,46.691 9.489,46.691 v1(9.5,46.68)
  BOT w0.1: v7@11.763,45.596 11.777,45.621 11.788,45.621 12.265,46.097 cw(c12.7,45.72) 12.323,46.155 12.522,46.355 13.411,46.355 15.008,44.758 27.532,44.758 28.52,45.745 v11(28.575,45.745)
ACC_EN: TP1300.1 U301.C7 U1300.6 | length 35.5
  TOP w0.076: v7(7.62,45.72) 7.341,45.441 7.341,44.109 U1300.6@7.9,43.55
  DVERT w0.076: v2(13.072,20.783) 13.072,21.552 12.921,21.703 12.921,23.742 13.835,24.656 13.835,25.8 13.835,26.296 13.985,26.446 13.985,37.668 13.985,37.736 14.518,38.27 14.518,39.72 14.614,39.816 14.614,40.055 14.461,40.208 13.959,40.71 13.959,45.95 v2(13.945,45.964)
  DHOR w0.076: v7(7.62,45.72) 7.925,46.025 11.108,46.025 11.169,45.964 v2(13.945,45.964) ; v1@12.857,20.557 12.857,20.563 13.07,20.776 v2@13.07,20.781
  other v1: 12.856,20.556
ACC_VDD: Q1300.3 R1300.1 R1301.1 R1304.1 TP1302.1 U1300.4 | length 5.5
  TOP w0.127: U1300.4@8.9,43.55 8.9,44.816 9.164,45.08 R1300.1@9.5,45.08 v7(9.5,45.735) R1301.1@9.5,46.12
  TOP w0.203: U1300.4@8.9,43.55 8.904,43.554 10.677,43.554 10.7,43.578 R1304.1@10.7,43.58
  BOT w0.127: v7(9.5,45.735) 9.5,45.72 9.507,45.727 10.153,45.727 TP1302.1@10.16,45.72
AMPL_RSTn: TP1112.1 U301.A2 U1100.3 | length 37.3
  TOP w0.076: U1100.3@-13.25,18.15 -13.25,18.148 v1(-13.246,18.152) ; v1(15.35,19.151) U301.A2@15.35,19.55
  DVERT w0.076: v7(-11.891,17.501) -11.37,16.98 v2(-11.37,15.406)
  DHOR w0.076: v1(-13.246,18.152) -13.026,17.932 -12.027,17.932 -11.891,17.796 v7(-11.891,17.501) ; v2(-11.37,15.406) -10.9,14.935 -7.423,14.935 -7.051,15.307 4.016,15.307 4.47,15.761 13.254,15.761 13.477,15.984 14.142,15.984 14.825,16.666 14.825,17.44 15.35,17.965 v1(15.35,19.151)
  BOT w0.076: v7(-11.891,17.501) -11.891,16.971 TP1112.1@-10.16,15.24
ANT+: C402.2 J200.1 L400.2 L401.2 R403.2 | length 13.2
  TOP w0.084: L400.2@14.707,43.849 L400.2@14.84,43.982 ; C402.2@14.84,44.679 C402.2@14.943,44.781 ; L401.2@14.943,45.552 L401.2@15.088,45.697 ; R403.2@15.088,46.378 R403.2@15.118,46.409 R403.2@15.088,46.44
  TOP w0.17: L400.2@14.84,43.982 C402.2@14.84,44.679 ; C402.2@14.943,44.781 L401.2@14.943,45.552 ; L401.2@15.088,45.697 R403.2@15.088,46.378 ; R403.2@15.088,46.44 v16(15.088,47.041) ; v16(17.187,54.518) J200.1@17.905,54.897
  DVERT w0.127: v13(15.085,46.701) v4(15.085,47.142) ; v4(16.367,54.184) 16.619,54.436 16.847,54.436 v13(16.861,54.451)
  GND 2 w0.076: v4@15.137,47.267 ccw(c3.006,51.924) 16,51.924 16,53.912 cw(c16.272,53.912) v4@16.272,54.184
  GND 2 w0.091: v4@16.272,54.184 v4(16.367,54.184)
  DHOR w0.127: v13(15.085,46.701) 15.088,46.704 v16(15.088,47.041) ; v13(16.861,54.451) ccw(c16.506,56.965) v16(17.187,54.518)
B1: Q1100.2 Q1100.3 Q1100.5 Q1102.3 R1100.2 | length 5.4
  TOP w0.152: Q1102.3@-18.499,28.702 -18.408,28.702 -18.327,28.62 -18.012,28.62 -17.923,28.531 -17.923,28.175 -17.833,28.086 -17.557,28.086 R1100.2@-17.499,28.027 -17.499,27.715 -17.346,27.562 -15.623,27.562 -15.5,27.685 Q1100.5@-15.499,27.902 Q1100.5@-15.499,27.902 Q1100.2@-15.499,28.802 Q1100.3@-15.849,28.802
B2: Q1101.2 Q1101.3 Q1101.5 Q1103.3 R1101.2 | length 5.4
  TOP w0.152: Q1103.3@-18.508,30.426 -18.418,30.426 -18.336,30.344 -18.022,30.344 -17.932,30.255 -17.932,29.899 -17.843,29.81 -17.567,29.81 R1101.2@-17.508,29.751 -17.508,29.439 -17.356,29.286 -15.633,29.286 -15.51,29.409 -15.51,29.624 Q1101.5@-15.508,29.626 Q1101.2@-15.508,30.526 Q1101.3@-15.858,30.526
BASE_VCC1: Q1118.1 R1148.2 | length 0.8
  TOP w0.102: R1148.2@-10.77,19.304 -10.77,19.429
  TOP w0.152: -10.77,19.429 -10.77,19.526 -10.627,19.67 Q1118.1@-10.627,20.039
BASE_VCC2: Q1119.1 R1151.2 | length 2
  TOP w0.152: R1151.2@-10.694,18.009 -10.717,17.986 -10.96,17.986 -11.049,17.897 -11.049,16.732 -10.96,16.643 Q1119.1@-10.639,16.643
BATT1_EN: R712.1 U709.B1 | length 1
  TOP w0.102: U709.B1@2.258,2.591 2.284,2.591 2.691,2.997 R712.1@3.048,2.997
BATT2_EN: R713.1 U710.B1 | length 1.5
  TOP w0.1: U710.B1@-0.432,2.607 -0.389,2.607 -0.307,2.689 0.664,2.689 0.751,2.602 0.751,2.463 0.766,2.448 0.786,2.448 R713.1@0.833,2.401
BATT.MON1: TP633.1 U301.J2 U604.A1 U604.C2 | length 31.5
  TOP w0.102: v7(6.375,8.077) 6.552,8.077 6.72,8.245 v1(6.73,8.245)
  DVERT w0.102: v2(15.621,23.821) v4(15.621,24.206)
  AVERT w0.102: v8(14.757,10.109) 14.757,14.324 15.555,15.122 15.555,22.345 15.621,22.411 v4(15.621,24.206)
  DHOR w0.102: v1(6.73,8.245) 7.13,8.245 v1(7.53,8.645) ; v1@15.351,23.549 15.351,23.551 v2@15.621,23.821
  AHOR w0.102: v7(6.375,8.077) 6.375,9.305 7.18,10.109 v8(14.757,10.109)
  BOT w0.102: v7(6.375,8.077) 6.375,7.569 7.112,6.833 9.373,6.833 TP633.1@10.16,7.62
  other v1: 15.35,23.55
BATT.MON2: TP634.1 U301.G4 U605.A1 U605.C2 | length 22.5
  TOP w0.102: v7(6.57,12.632) 7.163,12.04 7.672,12.04 8.515,11.196 v1(8.515,11.182)
  DVERT w0.102: v4@14.123,22.466 v2(14.123,22.766)
  AVERT w0.102: v8(12.969,12.852) 12.969,14.925 13.503,15.459 13.503,18.8 13.503,21.276 13.293,21.486 13.293,22.002 13.726,22.435 v4(14.113,22.435)
  DHOR w0.102: v1(8.515,11.182) 8.92,11.182 v1(9.322,11.584) ; v2@14.13,22.764 v1@14.344,22.551
  AHOR w0.102: v7(6.57,12.632) 6.789,12.852 v8(12.969,12.852)
  BOT w0.102: TP634.1@5.148,12.632 v7(6.57,12.632)
  other v1: 14.35,22.55
BATT.MON_EN: C606.2 C607.2 M622.1 TP635.1 U301.K2 U604.A2 U605.A2 | length 28.5
  TOP w0.102: C606.2@7.361,7.449 7.361,7.797 7.53,7.966 v1(7.53,8.245) ; v1(9.315,11.182) 9.358,11.182 9.427,11.114 C607.2@10.211,11.114
  DVERT w0.102: v2(7.938,8.245) v7(7.938,8.932) 7.947,8.941 7.947,9.224 v2@8.098,9.375 ; v2(8.098,9.402) 8.098,10.311 8.633,10.846 v2(8.865,10.846) 8.875,10.856 8.875,13.742 v2(8.872,13.745)
  DHOR w0.102: v1(7.53,8.245) v2(7.938,8.245) ; v1(7.953,9.675) 8.083,9.545 8.083,9.417 v2(8.098,9.402) ; v2(8.865,10.846) 9.182,11.164 9.297,11.164 v1(9.315,11.182) ; v2(8.872,13.745) 8.876,13.741 13.594,13.741 14.318,14.465 14.592,14.465 15.216,15.089 16.112,15.089 16.936,15.913 16.936,21.637 16.56,22.013 16.56,23.351 15.86,24.05 v1(15.35,24.05)
  BOT w0.102: TP635.1@7.62,10.16 7.62,9.25 v7(7.938,8.932)
BATT.SW_EN: D604.2 TP631.1 U301.G11 | length 38.2
  TOP w0.076: U301.G11@10.85,22.55 10.881,22.55 11.131,22.3 v16(11.162,22.3)
  DVERT w0.076: v4(-2.05,12.604) -0.496,14.158 -0.496,17.762 -0.635,17.901 -0.635,18.313 v2(-0.483,18.466) ; v17(10.558,19.407) v2(10.901,19.066) ; v13(10.864,22.416) 11.102,22.416 11.219,22.299 v17(11.281,22.299)
  DVERT w0.102: v9(-1.534,2.671) -0.643,1.78 v2(-0.643,0.276)
  GND 2 w0.076: v4(-2.05,12.604) -2.006,12.56 -1.824,12.56 -1.369,12.105 -1.369,2.883 -1.534,2.718 v9(-1.534,2.671)
  AVERT w0.076: v17(10.558,19.407) 10.884,19.733 10.884,21.912 11.271,22.299 v17(11.281,22.299)
  DHOR w0.076: v2(-0.483,18.466) 1.322,18.466 1.595,18.739 2.137,18.739 2.219,18.657 6.11,18.657 6.262,18.809 7.034,18.809 v7(7.208,18.983) 7.222,18.983 7.367,19.128 9.16,19.128 9.279,19.008 10.817,19.008 10.874,19.066 v2(10.901,19.066) ; v13(10.864,22.416) 10.888,22.391 11.036,22.391 11.128,22.3 v16(11.162,22.3)
  DHOR w0.102: v1(-0.948,0.28) -0.946,0.278 -0.646,0.278 v2(-0.643,0.276)
  BOT w0.076: v7(7.208,18.983) 7.255,18.983 7.62,18.618 TP631.1@7.62,17.78
BATT_ENn: D601.1 D603.1 R620.2 TP628.1 | length 31.6
  TOP w0.076: D601.1@-3.441,1.803 v1(-2.972,1.803) ; v1(3.531,1.93) 3.531,1.965 3.621,2.055 3.621,2.258 3.708,2.344 D603.1@3.763,2.344
  DVERT w0.076: v9@2.489,2.616 v9(2.489,2.591) v2(3.15,1.93)
  GND 2 w0.076: v9(2.489,2.591) 2.138,2.942 1.904,2.942 1.392,3.453 1.106,3.453 1.061,3.498 1.061,11.988 1.344,12.271 1.677,12.271 1.96,12.554 v4(2.516,12.554)
  AVERT w0.076: v4(2.516,12.554) 2.549,12.554 2.73,12.736 2.931,12.736 v8(2.946,12.751)
  DHOR w0.076: v1(-2.972,1.803) -1.229,1.803 v1(1.106,-0.532) v1(1.106,-0.532) v2@1.408,-0.534 ; v2(1.411,-0.536) 1.411,0.192 v2(3.15,1.93) v1(3.531,1.93)
  AHOR w0.076: v12(2.225,12.764) 2.933,12.764 v8(2.946,12.751)
  BOT w0.076: v12(2.225,12.764) 4.233,14.772 4.233,15.678 4.437,15.882 6.978,15.882 TP628.1@7.62,15.24
BATT_SW: C800.1 R623.2 R624.2 TP632.1 U607.2 U801.6 U802.3 U802.6 | length 38.3
  TOP w0.102: R623.2@-1.12,-0.529 R624.2@-0.28,-0.529 -0.28,0.431 0.051,0.762 v1(0.514,0.763) ; U802.6@13.266,11.029 13.235,10.998 12.675,10.998 v7(12.414,11.259) C800.1@12.414,11.913 12.418,11.917 12.418,12.265 12.553,12.401 U801.6@13.266,12.401 13.266,12.179 13.716,11.729 U802.3@14.166,11.729 14.168,11.729 U802.3@14.199,11.76
  DVERT w0.102: v2(0.819,0.759) 1.482,1.422 v9(1.482,2.048)
  GND 2 w0.102: v4(0.93,13.173) 0.884,13.173 0.515,12.804 0.515,10.858 0.515,3.759 0.515,3.487 0.202,3.175 0.202,2.631 0.785,2.048 v9(1.482,2.048)
  AVERT w0.102: v4(0.93,13.173) 0.914,13.188 0.914,13.435 0.991,13.511 v8(0.991,13.538) ; v7(12.414,11.259) 12.431,11.277 12.431,13.495 v8(12.449,13.513)
  DHOR w0.102: v1(0.514,0.763) v1(0.514,0.763) v2@0.816,0.761
  AHOR w0.102: v8(0.991,13.538) 1.003,13.525 12.436,13.525 v8(12.449,13.513)
  BOT w0.102: TP632.1@10.16,10.16 11.259,11.259 v7(12.414,11.259)
  BOT w0.191: TP632.1@10.16,10.16 TP632.1@10.296,10.024
BLE_P.1: TP404.1 U301.A6 U400.F3 | length 30
  TOP w0.076: v1(13.35,19.151) U301.A6@13.35,19.55 ; v1(13.979,39.349) 13.979,39.345 14.152,39.172 U400.F3@14.152,39.168
  DVERT w0.076: v13(13.054,37.063) 13.054,39.165 v7(13.081,39.192) ; v2(13.197,18.872) 14.58,18.872 16.913,21.205 16.913,22.101 17.116,22.304 17.116,35.491 17.31,35.685 v13(17.31,35.89)
  DHOR w0.076: v13(13.054,37.063) 14.227,35.89 v13(17.31,35.89) ; v7(13.081,39.192) 13.096,39.207 13.478,39.207 13.816,39.207 13.958,39.349 v1(13.979,39.349) ; v2(13.197,18.872) 13.197,18.907 13.326,19.035 13.326,19.126 v1(13.35,19.151)
  BOT w0.076: TP404.1@12.7,40.64 12.7,39.573 v7(13.081,39.192)
BLE_P.2: TP405.1 U301.G9 U400.G4 | length 18.7
  TOP w0.076: v1(11.85,22.55) U301.G9@11.852,22.55 ; v7(12.7,38) 12.744,38.044 12.744,38.144 13.352,38.752 13.478,38.752 13.737,38.752 U400.G4@13.752,38.768
  DVERT w0.076: v2(11.35,36.64) 11.35,36.607 11.214,36.471 11.214,31.276 11.184,31.246 11.184,25.8 11.184,25.225 10.799,24.839 10.799,23.238 11.609,22.428 11.609,22.347 v2(11.634,22.323)
  DHOR w0.076: v2(11.35,36.64) 11.647,36.64 12.7,37.694 v7(12.7,38) ; v2@11.636,22.325 11.636,22.33 11.849,22.544 v1(11.85,22.55)
BLE_PWRn: M400.1 R400.2 TP406.1 U301.C12 | length 22.6
  TOP w0.076: v1(9.951,20.55) U301.C12@10.35,20.55 ; v7(15.242,34.634) 15.625,34.251 M400.1@15.884,34.251 15.884,33.999 15.976,33.906 R400.2@15.976,33.553
  DVERT w0.076: v2(9.754,20.804) 9.772,20.822 9.772,25.8 9.772,25.838 9.614,25.996 9.614,27.615 9.748,27.749 9.748,34.614 v2(9.754,34.62)
  DHOR w0.076: v2(9.754,20.804) 9.754,20.776 9.951,20.579 v1(9.951,20.55) ; v2(9.754,34.62) 9.76,34.627 15.235,34.627 v7(15.242,34.634)
  BOT w0.076: v7@15.241,34.635 TP406.1@15.24,35.56
BLE_RSTn: J400.10 R401.2 TP403.1 U301.F9 U400.F2 | length 78.2
  TOP w0.076: U301.F9@11.85,22.05 11.896,22.05 12.135,22.289 12.21,22.289 v7(12.253,22.332) ; v1(13.965,39.761) 13.965,39.756 U400.F2@14.152,39.568
  TOP w0.102: v7(39.065,37.69) 39.065,50.068 39.924,50.927 J400.10@41.58,50.927
  TOP w0.127: R401.2@39.377,54.458 39.377,53.917 41.58,51.714 J400.10@41.58,50.927
  DVERT w0.076: v7(12.253,22.332) 12.253,22.336 12.066,22.523 12.066,23.757 12.37,24.061 12.37,25.571 13.118,26.32 13.118,27.532 13.543,27.957 13.543,39.328 13.591,39.376 13.591,39.544 v2(13.615,39.568)
  DHOR w0.076: v2(13.615,39.568) 13.784,39.737 13.94,39.737 v1(13.965,39.761)
  BOT w0.102: v7(12.253,22.332) 12.253,24.953 TP403.1@12.7,25.4 16.336,29.036 16.336,36.845 17.185,37.694 v7@39.065,37.694
BLE_SWDCLK: J400.4 TP400.1 U400.G1 | length 37.6
  TOP w0.076: v7@13.749,40.368 13.752,40.364 U400.G1@13.752,39.968
  BOT w0.102: v7(13.749,40.364) 13.749,40.617 11.532,42.834 11.532,44.577 12.675,45.72 TP400.1@12.7,45.72 13.411,45.72 14.631,44.5 36.397,44.5 39.014,47.117 J400.4@41.58,47.117
BLE_SWDIO: J400.2 TP402.1 U400.F1 | length 34.5
  TOP w0.076: v7(13.665,41.25) 14.152,40.762 U400.F1@14.152,39.968
  BOT w0.102: v7(13.665,41.25) 12.7,42.215 TP402.1@12.7,43.18 12.7,44.425 12.745,44.47 12.76,44.484 13.186,44.5 13.433,44.5 14.55,44.323 14.566,44.322 36.463,44.322 36.479,44.323 37.773,44.53 39.091,45.847 J400.2@41.58,45.847
BLE_UART.RX: JP1403.1 TP1405.1 U400.E2 | length 43
  DVERT w0.102: v4@14.064,40.054 14.079,40.039 14.297,40.039 14.37,39.966 v2(14.398,39.966)
  AVERT w0.102: v8(13.965,39.758) 13.984,39.778 13.984,39.934 14.064,40.013 v4@14.064,40.054
  DHOR w0.102: v2(14.398,39.966) 14.398,39.938 14.533,39.803 14.533,39.587 v1(14.553,39.568)
  AHOR w0.102: v8(13.965,39.758) 13.971,39.752 14.372,39.752 v12(14.378,39.746) ; v12(35.281,40.538) 35.293,40.526 35.293,24.828 v12(35.306,24.816)
  BOT w0.102: TP1405.1@15.24,38.1 14.54,38.1 14.378,38.262 v12(14.378,39.746) 14.84,40.208 15.171,40.538 18.234,40.538 18.582,40.538 v12(35.281,40.538) ; JP1403.1@35.306,22.771 v12(35.306,24.816)
  other v4: 14.073,40.078
BLE_UART.TX: JP1401.1 TP1406.1 U400.G2 | length 44.9
  TOP w0.076: v7(13.181,39.584) 13.197,39.568 13.478,39.568 U400.G2@13.752,39.568
  AHOR w0.102: v12(32.207,24.816) 34.747,27.356 v12(34.747,40.843)
  BOT w0.102: v7(13.181,39.584) 13.208,39.612 13.478,39.612 13.67,39.612 14.309,40.25 14.309,42.249 15.24,43.18 17.577,40.843 18.234,40.843 18.582,40.843 v12(34.747,40.843) ; v12(32.207,24.816) 32.207,22.831 JP1401.1@32.266,22.771
BLE_XL1: C407.2 U400.B5 Y401.1 | length 2.6
  TOP w0.127: Y401.1@15.752,36.648 15.968,36.433 15.968,35.436 C407.2@15.953,35.436
  DHOR w0.127: v1(15.353,38.368) 15.353,37.348 v1(15.508,37.192)
BLE_XL2: C406.2 U400.D5 Y401.2 | length 3.3
  TOP w0.127: C406.2@13.953,35.436 13.953,36.448 Y401.2@14.152,36.648
  TOP w0.2: U400.D5@14.953,38.368 v1@15.059,38.474
  DHOR w0.127: v1(14.383,37.195) 14.398,37.21 14.398,37.263 14.403,37.269 14.403,38.253 14.622,38.471 v1(15.062,38.471)
BST1_VCHG: C507.1 U502.1
BST2_VCHG: C506.1 U502.16
CB_EN: Q1300.1 TP1301.1 U301.B7 U1301.2 U1301.5 | length 33.7
  TOP w0.076: Q1300.1@9.625,43.06 9.625,42.597 v7(9.627,42.596) ; U1301.2@10.447,45.314 v1(10.814,45.314) U1301.5@11.347,45.314 ; v1(12.592,19.344) 12.599,19.351 12.599,19.799 U301.B7@12.85,20.05
  DVERT w0.076: v2(9.525,19.758) 9.525,21.188 9.246,21.468 9.246,29.87 9.169,29.947 9.169,30.632 9.246,30.709 9.246,34.418 10.054,35.226 10.054,36.88 10.054,38.92 10.054,39.603 10.037,39.62 10.037,39.841 10.054,39.858 10.054,42.168 v7(9.627,42.596) 9.621,42.601 9.621,45.294 v2(9.616,45.299)
  DHOR w0.076: v2(9.525,19.758) 9.547,19.779 12.157,19.779 v1(12.592,19.344) ; v2(9.616,45.299) 9.623,45.306 10.807,45.306 v1(10.814,45.314)
  BOT w0.076: v7(9.627,42.596) 9.627,42.621 10.16,43.155 TP1301.1@10.16,43.18
CH1: C1201.2 C1514.1 C1515.1 C1516.1 C1521.1 D1201.2 J1201.1 J1218.1 J1218.2 | length 44.8
  TOP w0.2: J1201.1@-10.552,58.657 cw(c-10.552,58.546) -10.441,58.546 -10.441,57.409 -10.453,57.409 -10.453,56.345 C1201.2@-10.463,56.335 C1201.2@-10.443,56.316 ; J1201.1@-10.341,58.536 cw(c-10.551,58.414) J1201.1@-10.309,58.414
  TOP w0.203: C1515.1@-14.313,42.329 C1514.1@-16.104,42.329 -16.104,45.695 -15.939,45.86 C1516.1@-15.209,45.86 C1521.1@-13.418,45.86
  TOP w0.5: J1218.1@-20.345,69.222 J1218.2@-20.345,71.762
  POWER w0.2: v6(-15.194,45.86) -14.5,46.554 -14.5,47.893 -14.5,52.478 -14.5,52.874 cw(c-11.724,52.874) -14.455,53.373 cw(c-11.724,52.874) -11.724,55.649 -10.705,55.649 ccw(c-10.705,55.892) -10.463,55.892 -10.463,56.335 ; -10.453,56.327 v6@-10.453,56.877
  BOT w0.2: J1218.1@-20.345,69.222 -20.345,66.98 -19.507,66.142 -14.376,66.142 -10.421,62.186 -10.421,58.834 J1201.1@-10.558,58.697
  other v6: -10.463,56.885
CH1_STIM_OR_SINK: C1514.2 C1515.2 C1516.2 C1521.2 U1501.11 | length 13.2
  TOP w0.203: U1501.11@-17.328,36.052 -17.328,36.378 -17.501,36.551 -17.501,38.786 -16.147,40.14 -16.147,40.686 C1514.2@-16.104,40.729 -13.576,40.729 -13.462,40.843 -13.462,44.216 C1521.2@-13.418,44.26 -13.664,44.26 C1516.2@-15.209,44.26
CH2: C1207.2 C1511.1 C1512.1 C1513.1 C1520.1 D1209.2 J1210.1 J1222.1 J1222.2 | length 45.5
  TOP w0.2: J1222.1@-15.265,69.222 -15.265,67.793 -11.572,64.1 -9.246,61.773 -9.246,59.977 -9.246,59.182 -8.761,58.697 J1210.1@-7.815,58.697 J1210.1@-7.536,58.697 ; C1207.2@-7.819,56.175 -7.809,56.323 J1210.1@-7.809,58.657
  TOP w0.203: C1512.1@-10.731,42.329 -10.808,42.329 -10.82,42.342 -12.509,42.342 C1513.1@-12.522,42.329 -12.522,45.708 -12.37,45.86 v6(-11.639,45.86) C1511.1@-11.627,45.86 C1520.1@-9.836,45.86
  TOP w0.5: J1222.1@-15.265,69.222 J1222.2@-15.265,71.762
  POWER w0.2: v6(-11.639,45.86) -13.351,45.86 -14.1,46.609 -14.1,52.856 cw(c-11.707,52.856) -11.707,55.249 -11.519,55.249 -11.519,55.248 -8.218,55.248 ccw(c-8.218,55.657) -7.809,55.657 -7.809,56.323 v6(-7.809,56.873)